# EAGLE board IMU_BNO085_Schematic (EAGLE 9.5.0)
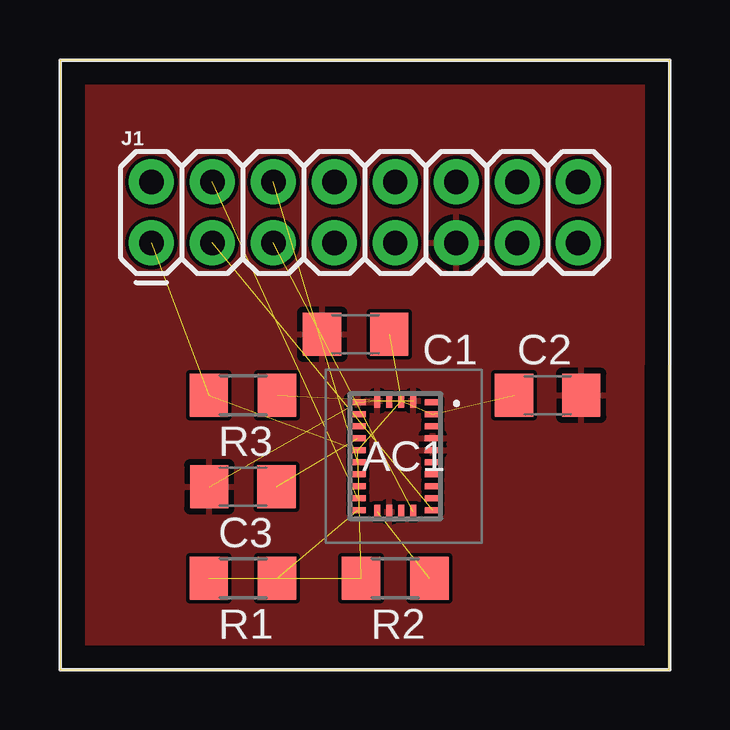
[diagram p0: board, top side]
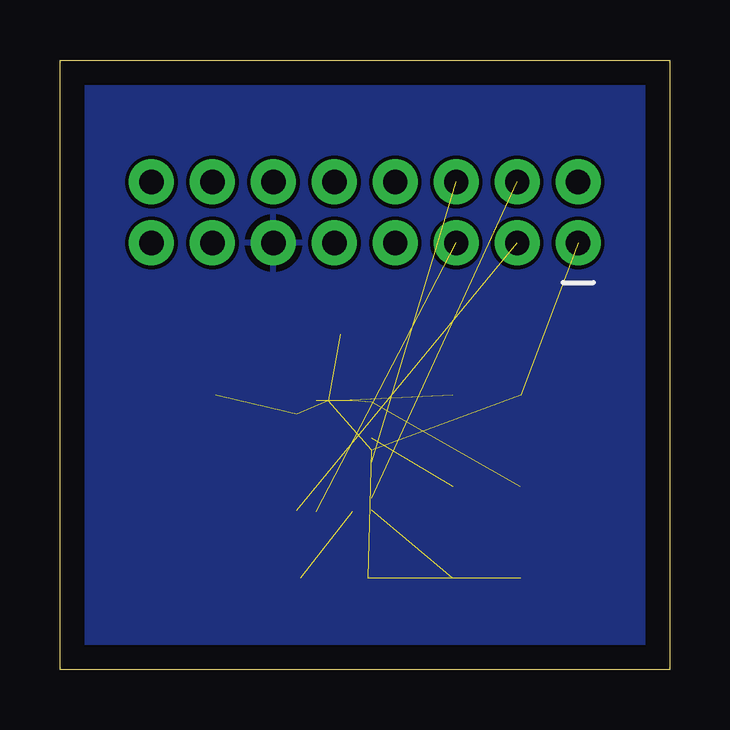
[diagram p1: board, bottom side, seen from below]

Size 25.4 x 25.4 mm. Coordinates in mm from the lower left corner, seen from the top.
Outline: 0,0 25.38,0 25.4,25.4 0,25.4 0,0
Copper layers (1*16): Top 0.035mm / dielectric 1.5mm / Bottom 0.035mm
Design rules "default": minimum track width 6mil, minimum drill 0.35mm, track to track 6mil, track to pad 6mil, pad to pad 6mil, via to via 6mil, smd to smd 6mil, copper to edge 40mil, drill to drill 6mil, minimum pad ring 10mil, minimum via ring 8mil, stop-mask expansion 4mil, vias tented up to drill 0mil, thermal gap 10mil
Net classes: 0 default: width 0.152 mm; 1 GND: width 0.254 mm; 2 PWR: width 0.254 mm

## Footprints (pad centres in the part's own frame; a part is rotated, then mirrored left to right if it is on the bottom)
BNO085 = smd 0.675 x 0.25: 1 1.563,2.25; 6 -1.563,2.25; 7 -1.563,1.75; 8 -1.563,1.25; 9 -1.563,0.75; 10 -1.563,0.25; 11 -1.563,-0.25; 12 -1.563,-0.75; 13 -1.563,-1.25; 14 -1.563,-1.75; 15 -1.563,-2.25; 20 1.563,-2.25; 21 1.563,-1.75; 22 1.563,-1.25; 23 1.563,-0.75; 24 1.563,-0.25; 25 1.563,0.25; 26 1.563,0.75; 27 1.563,1.25; 28 1.563,1.75 | smd 0.25 x 0.575: 2 0.75,2.313; 3 0.25,2.313; 4 -0.25,2.313; 5 -0.75,2.313; 16 -0.75,-2.313; 17 -0.25,-2.313; 18 0.25,-2.313; 19 0.75,-2.313
C1206 = smd 1.6 x 1.8: 1 -1.4,0; 2 1.4,0
2X7 = drill 1.016 pad 1.88: 1 -8.89,5.08; 2 -8.89,7.62; 3 -6.35,5.08; 4 -6.35,7.62; 5 -3.81,5.08; 6 -3.81,7.62; 7 -1.27,5.08; 8 -1.27,7.62; 9 1.27,5.08; 10 1.27,7.62; 11 3.81,5.08; 12 3.81,7.62; 13 6.35,5.08; 14 6.35,7.62; 15 8.89,5.08; 16 8.89,7.62
R1206 = smd 1.6 x 1.803: 1 -1.422,0; 2 1.422,0

## Placement (x,y rotation side)
AC1  BNO085  [BNO085]  13.97,8.89 0 top
C1  0.1u  [C1206]  12.32,13.97 180 top
C2  0.1u  [C1206]  20.32,11.43 0 top
C3  0.1u  [C1206]  7.62,7.62 180 top
J1  2X6 FEMALE  [2X7]  12.7,12.7 0 top
R1  [R1206]  7.62,3.81 180 top
R2  [R1206]  13.97,3.81 180 top
R3  [R1206]  7.62,11.43 180 top

## Library data of the parts
AC1 = BNO085; DESCRIPTION: IMU ACCEL/GYRO/MAG I2C 32BIT; HEIGHT: 1.18mm; MANUFACTURER_NAME: Hillcrest Laboratories, Inc.; MANUFACTURER_PART_NUMBER: BNO085
C1-C3 R1-R3 = RTR Main Library
J1 = RTR Main Library; PROD_ID: CONN-12423

## Nets
5V [PWR]: J1.2
GND [GND]: AC1.2 AC1.5 AC1.6 AC1.17 AC1.25 AC1.26 C1.2 C2.2 C3.2 J1.11
INT: AC1.14 J1.4
N$1: AC1.4 R3.1
N$3: AC1.9 C3.1
N$4: AC1.15 R1.1
N$5: AC1.16 R2.1
RST: AC1.11 J1.6
SCL: AC1.19 J1.5
SDA: AC1.20 J1.3
VCC [PWR]: AC1.3 AC1.10 AC1.28 C1.1 C2.1 J1.1 R1.2 R2.2 R3.2

## Tracks (layer width: path | path; a pad name or v marks a point on that pad's centre or on a via)
GND  (3 unrouted)
  pour Top: -3.81,27.94 29.21,27.94 29.21,-2.54 -3.81,-2.54
  pour Bottom: -6.35,29.21 30.48,29.21 30.48,-3.81 -6.35,-3.81
INT  (1 unrouted)
N$1  (1 unrouted)
N$3  (1 unrouted)
N$4  (1 unrouted)
N$5  (1 unrouted)
RST  (1 unrouted)
SCL  (1 unrouted)
SDA  (1 unrouted)
VCC  (8 unrouted)